# Altium PCB pk36.PcbDoc
Units mil, origin at the board's own origin, x right, y up, seen from the top; angles counter-clockwise.
Board outline 6000 x 4000 mil, 2 copper layers (Top Layer, Bottom Layer); 36 components, 27 nets, 198 pads, 18 vias.
Unrouted connection lines stored in the file: 51.
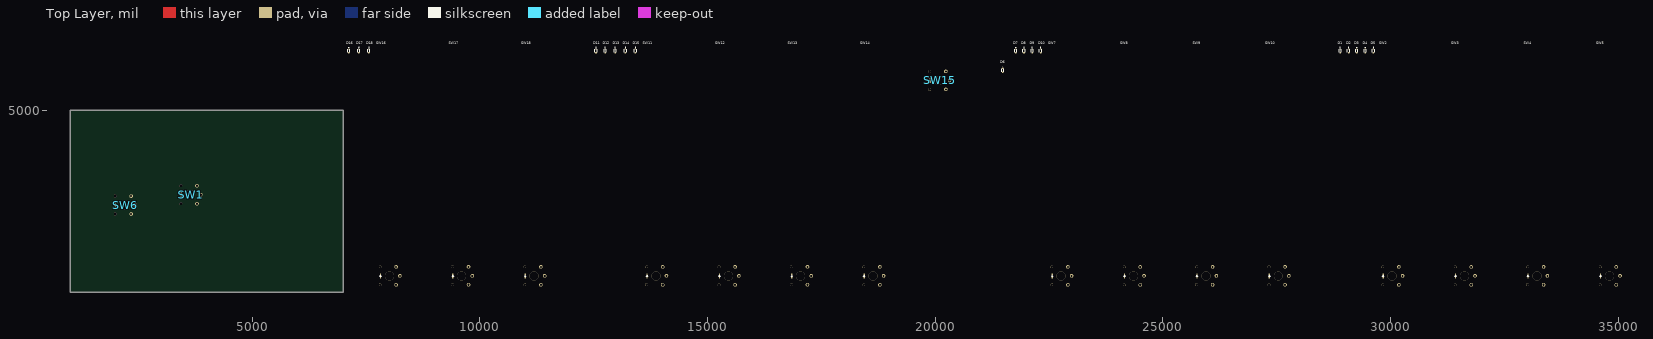
[diagram p0: Top Layer view]
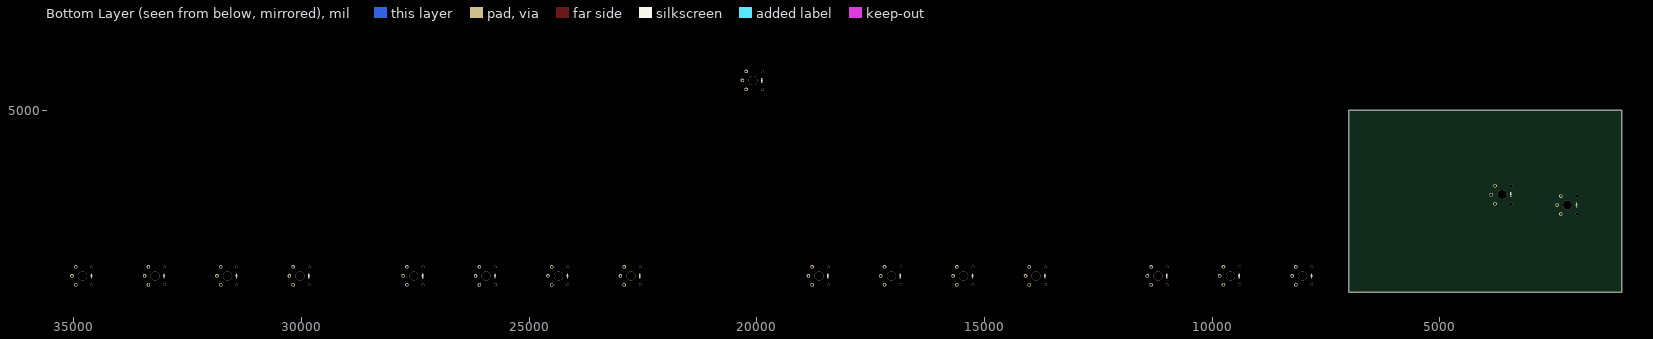
[diagram p1: Bottom Layer view, seen from below]

## Layer stack, top to bottom
Top Solder: solder mask 0.4, Solder Resist, Dk 3.5
Top Layer: signal copper 1.4
Dielectric 1: dielectric 12.6, FR-4, Dk 4.8
Bottom Layer: signal copper 1.4
Bottom Solder: solder mask 0.4, Solder Resist, Dk 3.5

## Board outline
1000,1000 7000,1000 7000,5000 1000,5000

## Design rules (kind name [scope] priority, off if disabled: settings)
Clearance [All] p1: gap=10 ignorepadtopadclearanceinfootprint=FALSE except(0: Arc-Hole Track-Hole SMDPad-Hole THPad-Hole Via-Hole Fill-Hole Poly-Hole Region-Hole Text-Hole)
PolygonConnect [All] p1: connectstyle=Relief reliefconductorwidth=10 reliefentries=4 polygonreliefangle="90 Angle" airgapwidth=10
RoutingVias [All] p1: holewidth=28 width=50 viastyle="Through Hole" minholewidth=28 minwidth=50 maxholewidth=28 maxwidth=50
SolderMaskExpansion [All] p1: expansion=4 istentingtop=FALSE
Width [All] p1: maxlimit=10 minlimit=10 preferedwidth=10
30 further rules are at their usual default settings.

## Components (designator, comment, footprint, x,y, rotation, side; value= is the part's Value field where it differs from the comment)
D1 "" UDZVTE1722B 28895,6325 r0 top
D2 "" UDZVTE1722B 29080,6325 r0 top
D3 "" UDZVTE1722B 29260,6325 r0 top
D4 "" UDZVTE1722B 29445,6325 r0 top
D5 "" UDZVTE1722B 29625,6325 r0 top
D6 "" UDZVTE1722B 21485,5900 r0 top
D7 "" UDZVTE1722B 21770,6325 r0 top
D8 "" UDZVTE1722B 21950,6325 r0 top
D9 "" UDZVTE1722B 22130,6325 r0 top
D10 "" UDZVTE1722B 22315,6325 r0 top
D11 "" UDZVTE1722B 12550,6325 r0 top
D12 "" UDZVTE1722B 12750,6325 r0 top
D13 "" UDZVTE1722B 12970,6325 r0 top
D14 "" UDZVTE1722B 13195,6325 r0 top
D15 "" UDZVTE1722B 13415,6325 r0 top
D16 "" UDZVTE1722B 7120,6325 r0 top
D17 "" UDZVTE1722B 7340,6325 r0 top
D18 "" UDZVTE1722B 7560,6325 r0 top
SW1 "" KAILH_LOW_PROFILE_V2_LED 3635.39,3146.85 r0 top
SW2 "" KAILH_LOW_PROFILE_V2_LED 30035,1365 r0 top
SW3 "" KAILH_LOW_PROFILE_V2_LED 31625,1365 r0 top
SW4 "" KAILH_LOW_PROFILE_V2_LED 33215,1365 r0 top
SW5 "" KAILH_LOW_PROFILE_V2_LED 34810,1365 r0 top
SW6 "" KAILH_LOW_PROFILE_V2_LED 2190,2920 r0 top
SW7 "" KAILH_LOW_PROFILE_V2_LED 22765,1365 r0 top
SW8 "" KAILH_LOW_PROFILE_V2_LED 24355,1365 r0 top
SW9 "" KAILH_LOW_PROFILE_V2_LED 25945,1365 r0 top
SW10 "" KAILH_LOW_PROFILE_V2_LED 27535,1365 r0 top
SW11 "" KAILH_LOW_PROFILE_V2_LED 13865,1365 r0 top
SW12 "" KAILH_LOW_PROFILE_V2_LED 15455,1365 r0 top
SW13 "" KAILH_LOW_PROFILE_V2_LED 17045,1365 r0 top
SW14 "" KAILH_LOW_PROFILE_V2_LED 18635,1365 r0 top
SW15 "" KAILH_LOW_PROFILE_V2_LED 20085.39,5658.15 r0 top
SW16 "" KAILH_LOW_PROFILE_V2_LED 8010,1365 r0 top
SW17 "" KAILH_LOW_PROFILE_V2_LED 9600,1365 r0 top
SW18 "" KAILH_LOW_PROFILE_V2_LED 11190,1365 r0 top

## Footprints (in the part's own frame and the unit in brackets; to place one, negate y for a bottom-side part, rotate by r counter-clockwise, add the part's x,y. Pads: shape width x height; smd on the part's side, far side on the other; paste and mask are expansions set on the pad)
KAILH_LOW_PROFILE_V2_LED [mm]
  round 1.5 hole 1.5: 1(-5.15,-5) 1(-5.15,5)
  round 2 hole 1.2: 2(3.8,-5) 2(3.8,5) 2(5.9,0)
  rect 0.7x1 smd: 3(-4.953,-0.911) 4(-4.953,0.889)
  rect 0.7x1 smd far side: 3(-4.953,-0.911) 4(-4.953,0.889)
  silkscreen extent -5.33,-0.13 -4.57,0.25, body extent -7.5,-7.5 7.5,7.5, height 9
UDZVTE1722B [mm]
  rect 0.9x0.8 smd: 1(0,0.575) 2(0,-1.525)
  silkscreen extent -0.63,-1.33 0.63,1.52, body extent -0.63,-1.76 0.63,0.74, height 0.71

## Part data
D1 D2 D3 D4 D5 D6 D7 D8 D9 D10 D11 D12 D13 D14 D15 D16 D17 D18: library part diode
SW1 SW2 SW3 SW4 SW5 SW6 SW7 SW8 SW9 SW10 SW11 SW12 SW13 SW14 SW15 SW16 SW17 SW18: library part Switch

## Via types
v1: diameter 196.85, hole 196.85, Top Layer to Bottom Layer, 18 vias

## Nets (pads, with @x,y where several pads share a name; then routed paths per layer and width w, separated by ;. In a path a pad name is that pad's centre, name@x,y a point inside that pad or via, vN(x,y) a via of type N, cw(c..) or ccw(c..) an arc to the next point about the centre after c; other vN are vias at no path point)
Col1: 
Col2: 
Col3: SW3.3
Col4: 
Col5: 
NetD1_1: D1.1 SW1.1
NetD2_1: D2.1 SW2.1
NetD3_1: D3.1 SW3.1
NetD4_1: D4.1 SW4.1
NetD5_1: D5.1 SW5.1
NetD6_1: D6.1 SW6.1
NetD7_1: D7.1 SW7.1
NetD8_1: D8.1 SW8.1
NetD9_1: D9.1 SW9.1
NetD10_1: D10.1 SW10.1
NetD11_1: D11.1 SW11.1
NetD12_1: D12.1 SW12.1
NetD13_1: D13.1 SW13.1
NetD14_1: D14.1 SW14.1
NetD15_1: D15.1 SW15.1
NetD16_1: D16.1 SW16.1
NetD17_1: D17.1 SW17.1
NetD18_1: D18.1 SW18.1
Row1: D1.2 D2.2 D3.2 D4.2 D5.2
Row2: D6.2 D7.2 D8.2 D9.2 D10.2
Row3: D11.2 D12.2 D13.2 D14.2 D15.2
Row4: D16.2 D17.2 D18.2
pads on no net: SW1.2 SW1.3 SW1.4 SW2.2 SW2.3 SW2.4 SW3.2 SW3.4 SW4.2 SW4.3 SW4.4 SW5.2 SW5.3 SW5.4 SW6.2 SW6.3 SW6.4 SW7.2 SW7.3 SW7.4 SW8.2 SW8.3 SW8.4 SW9.2 SW9.3 SW9.4 SW10.2 SW10.3 SW10.4 SW11.2 SW11.3 SW11.4 SW12.2 SW12.3 SW12.4 SW13.2 SW13.3 SW13.4 SW14.2 SW14.3 SW14.4 SW15.2 SW15.3 SW15.4 SW16.2 SW16.3 SW16.4 SW17.2 SW17.3 SW17.4 SW18.2 SW18.3 SW18.4
copper on no net:
  other v1: 8010,1365 9600,1365 11190,1365 13865,1365 15455,1365 17045,1365 18635,1365 22765,1365 24355,1365 25945,1365 27535,1365 30035,1365 31625,1365 33215,1365 34810,1365 2190,2920 3635.39,3146.85 20085.39,5658.15